# Altium PCB VESC_POWER_91mm.PcbDoc
Units mm, origin at the board's own origin, x right, y up, seen from the top; angles counter-clockwise.
Board outline 91 x 56 mm, 4 copper layers (Top Layer, Layer 1, Layer 2, Bottom Layer), stack 1.622 mm thick; 66 components, 20 nets, 161 pads, 1124 vias.
Unrouted connection lines stored in the file: 74.
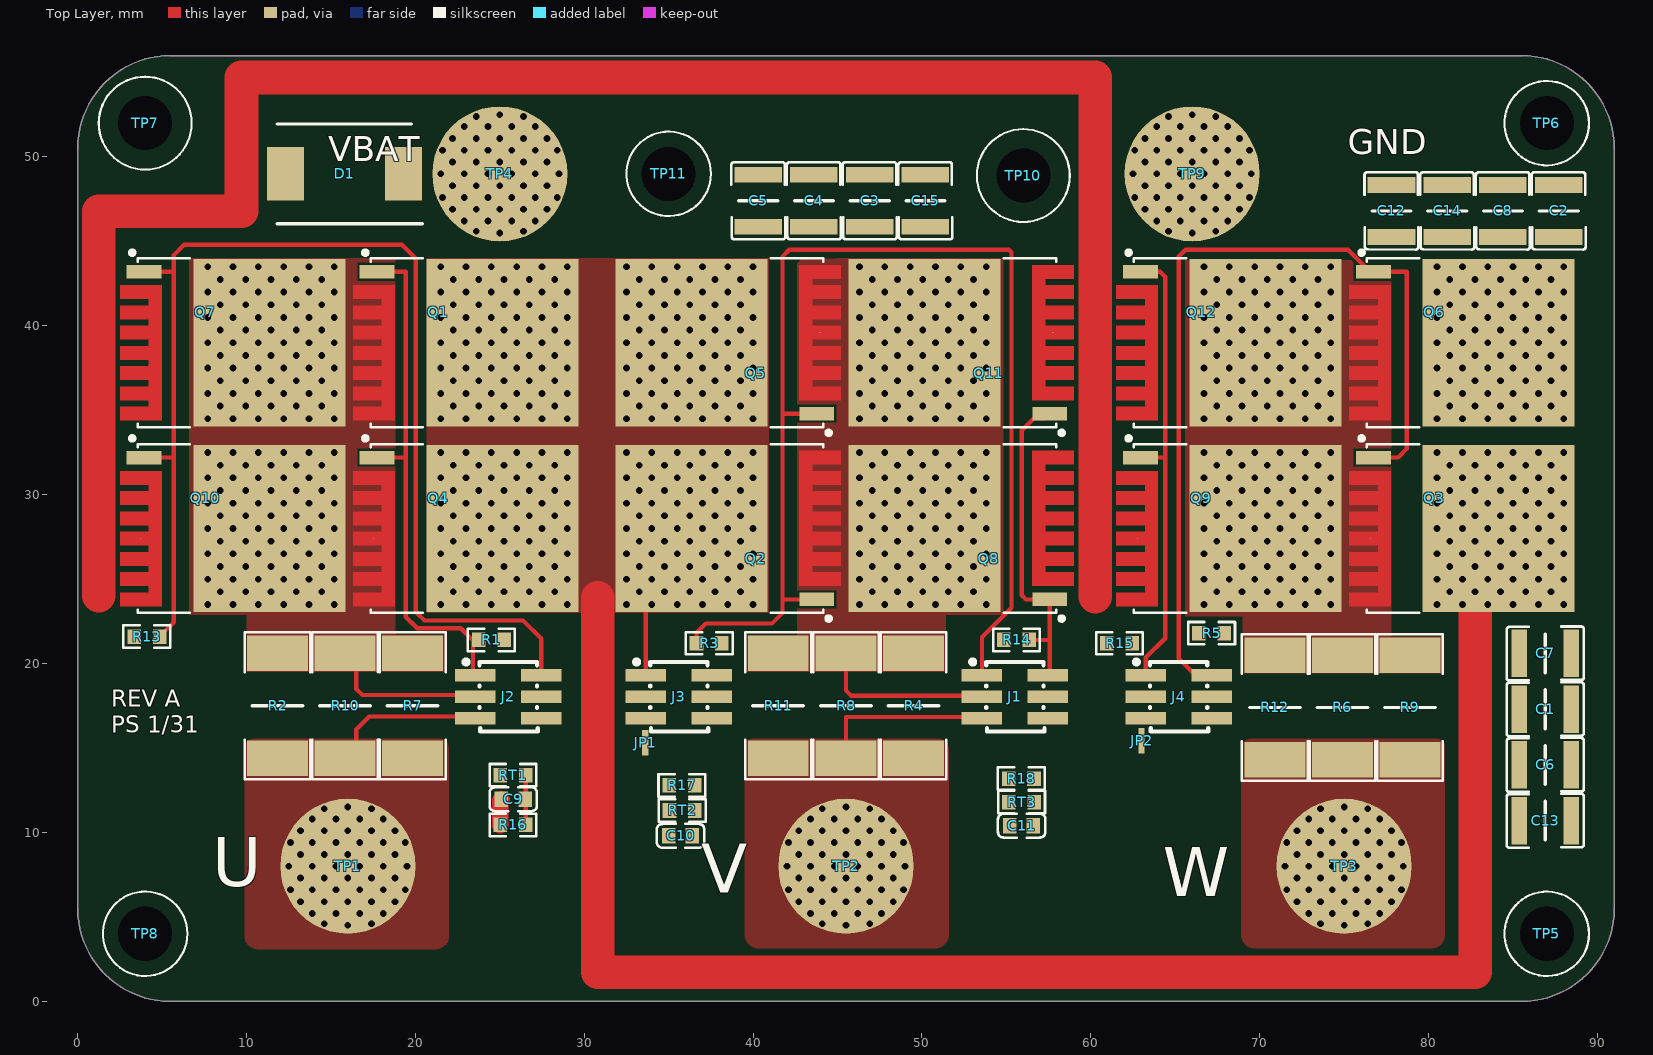
[diagram p0: Top Layer view]
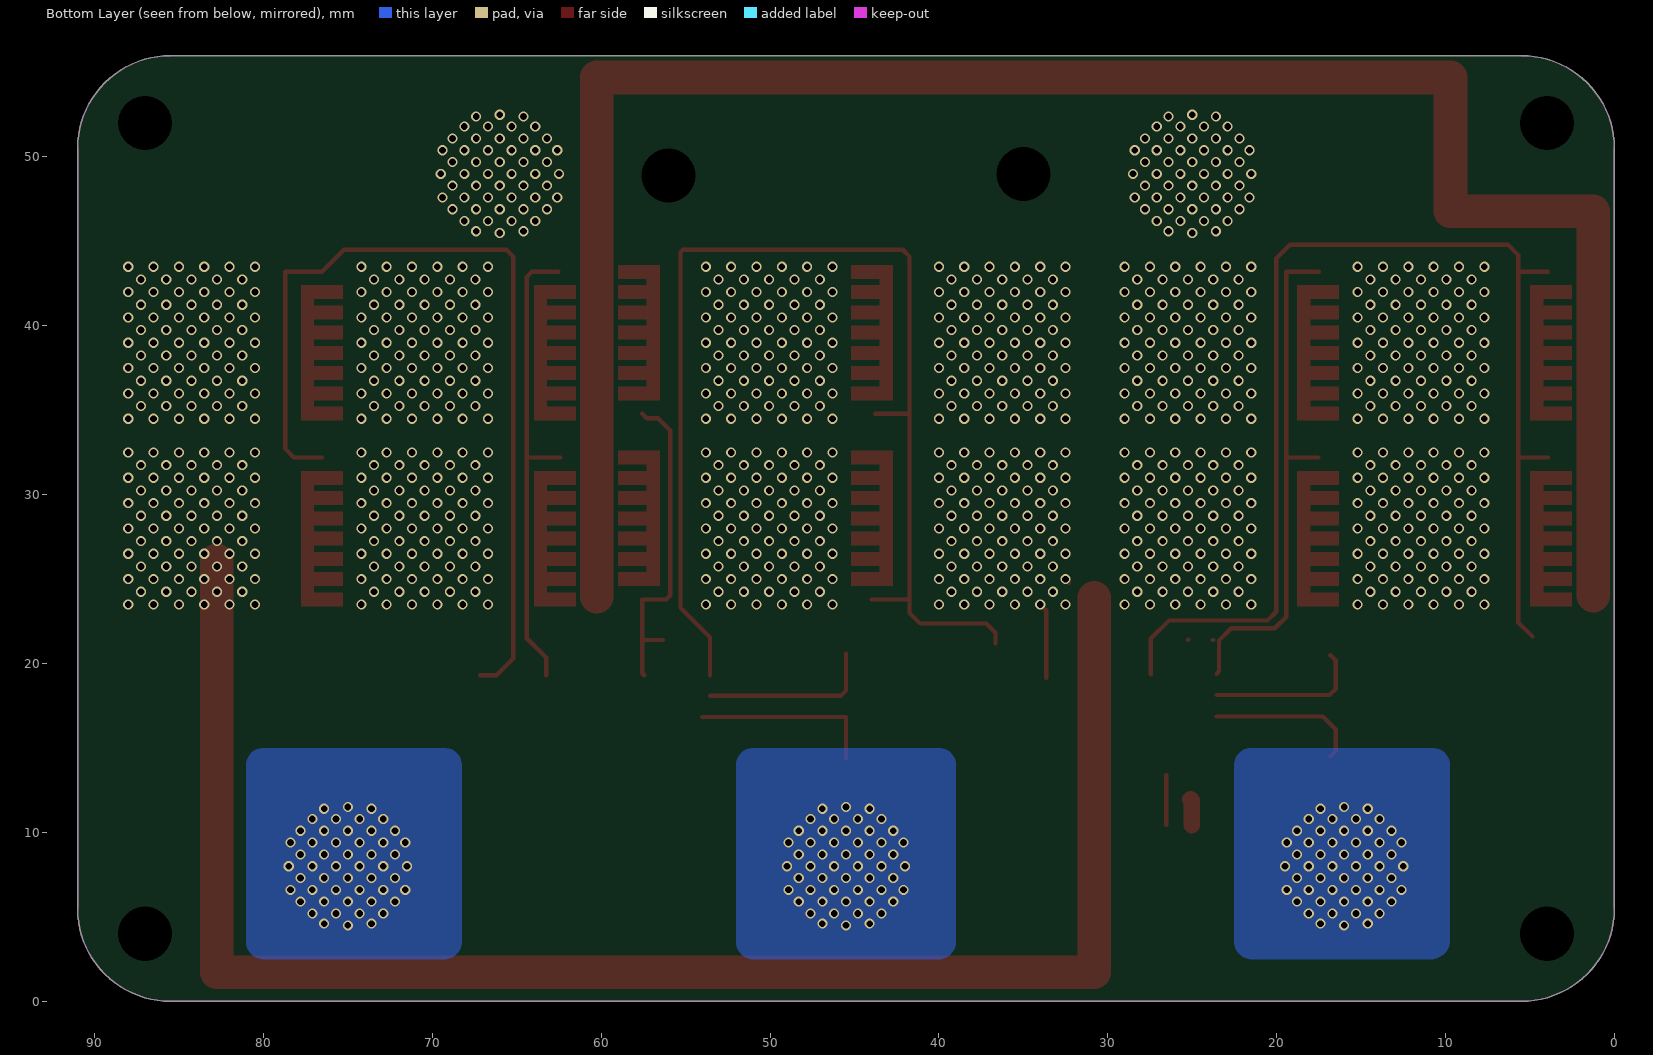
[diagram p1: Bottom Layer view, seen from below]
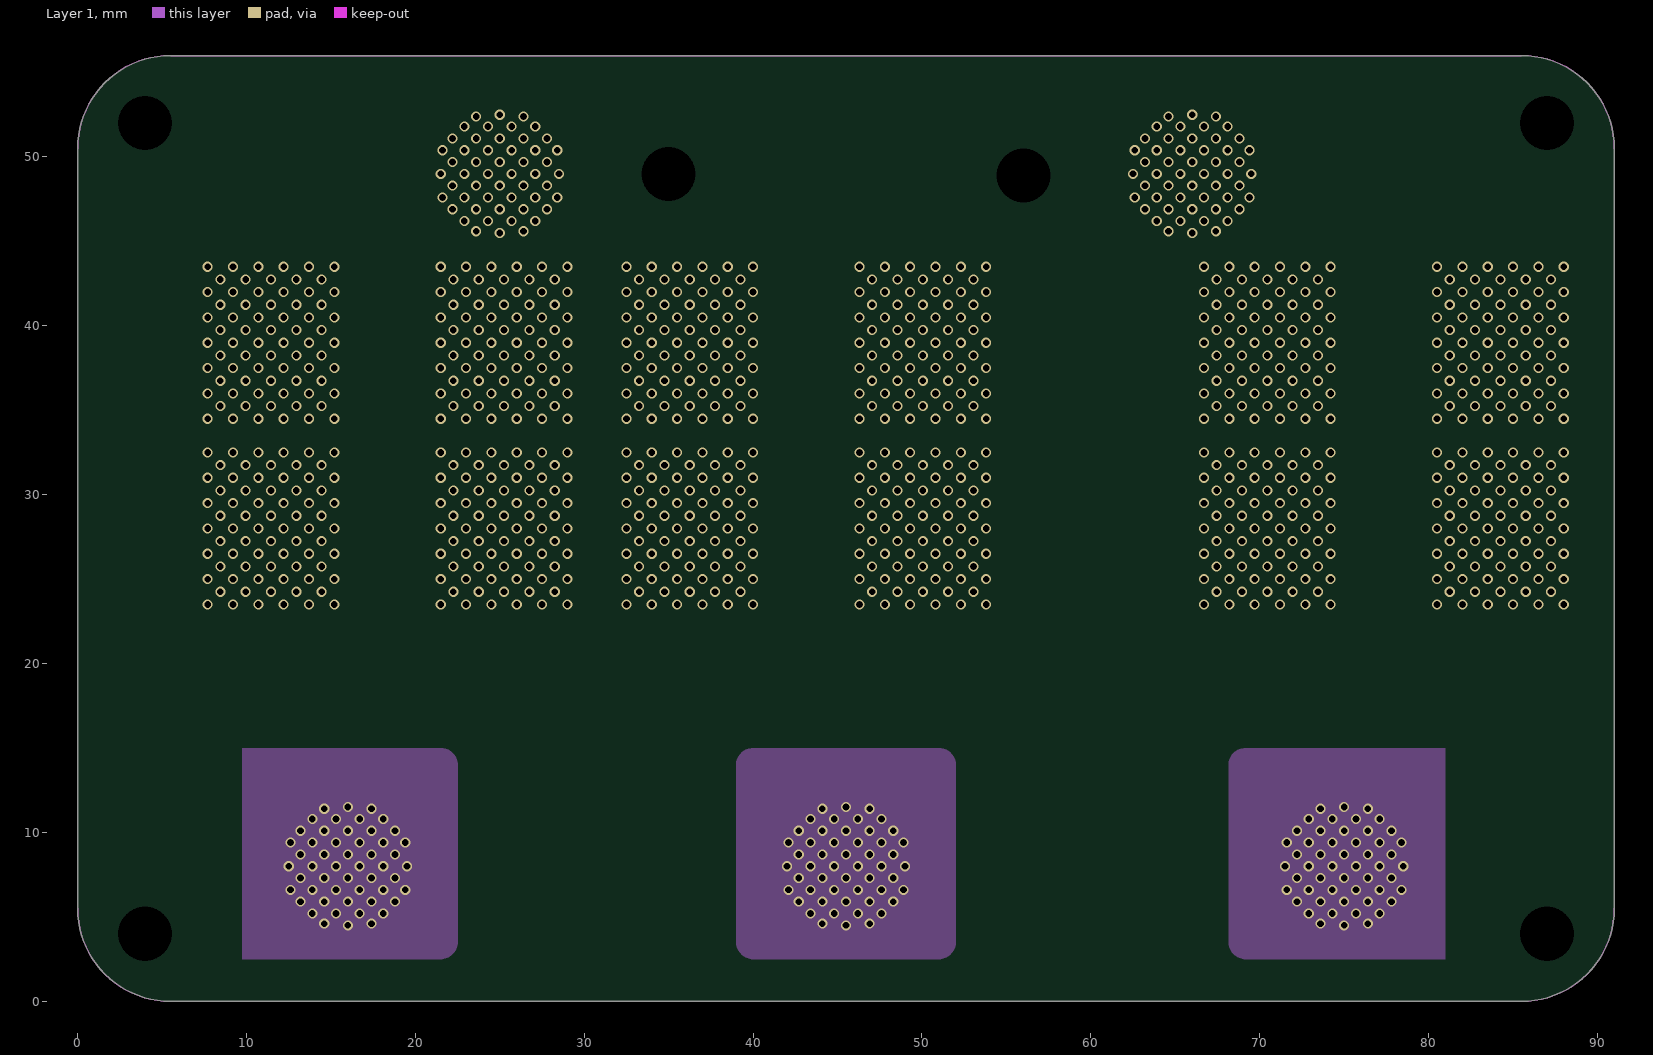
[diagram p2: Layer 1]
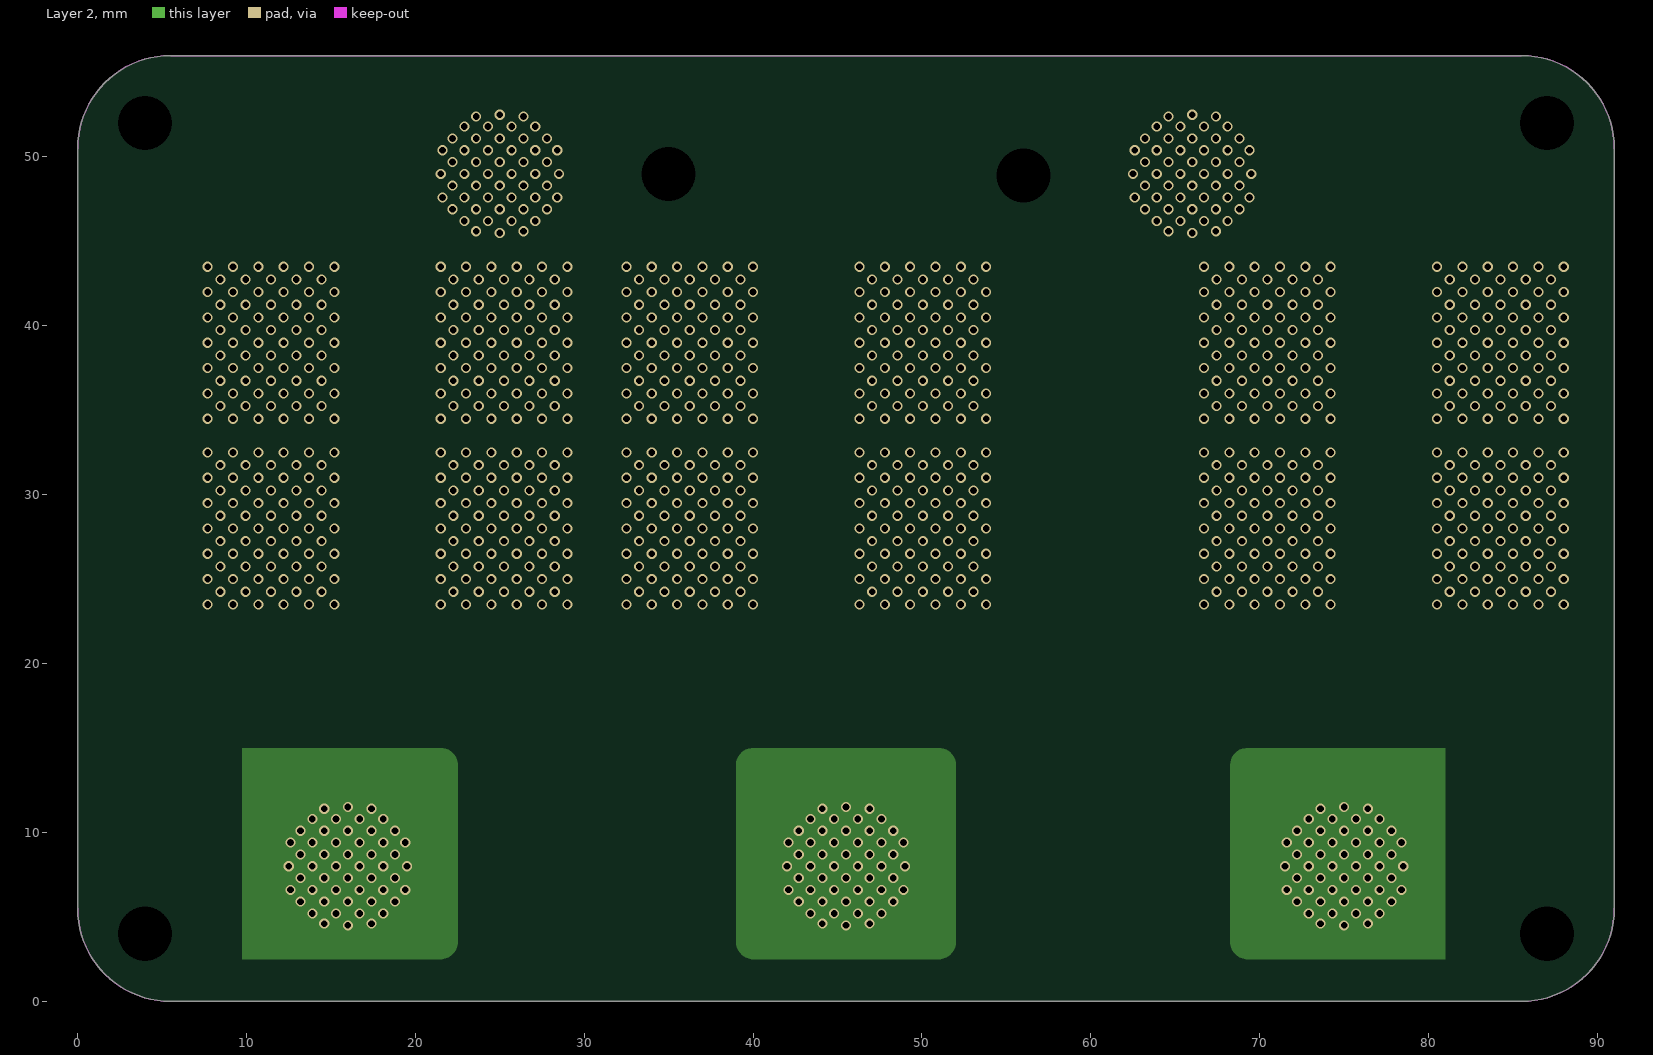
[diagram p3: Layer 2]

## Layer stack, top to bottom
Top Solder: solder mask 0.0102, Solder Resist, Dk 3.5
Top Layer: signal copper 0.035
Dielectric 2: prepreg 0.2083, PP-022, Dk 4.5
Layer 1: signal copper 0.0175
Dielectric 1: core 1.1, Core-024, Dk 4.6
Layer 2: signal copper 0.0175
Dielectric 3: prepreg 0.2083, PP-022, Dk 4.5
Bottom Layer: signal copper 0.035
Bottom Solder: solder mask 0.0102, Solder Resist, Dk 3.5

## Board outline
0,5.5 ccw(c5.5,5.5) 5.5,0 85.5,0 ccw(c85.5,5.5) 91,5.5 91,50.5 ccw(c85.5,50.5) 85.5,56 5.5,56 ccw(c5.5,50.5) 0,50.5

## Design rules (kind name [scope] priority, off if disabled: settings)
BoardOutlineClearance [All] p1: gap=0.254 ignorepadtopadclearanceinfootprint=FALSE except(0: Arc-SplitContinuation Track-SplitContinuation SMDPad-SplitContinuation THPad-SplitContinuation Via-SplitContinuation Fill-SplitContinuation Poly-SplitContinuation Region-SplitContinuation Text-SplitContinuation)
Clearance [All] p1: gap=0.152 ignorepadtopadclearanceinfootprint=FALSE
HoleSize [All] p1: absolutevalues=TRUE maxlimit=5 minlimit=0.025 maxpercent=80.000 minpercent=20.000
HoleToHoleClearance [All] p1: gap=0.229 allowstackedmicrovias=TRUE
MinimumSolderMaskSliver [All] p1: minsoldermaskwidth=0.051
PolygonConnect [All] p1: connectstyle=Direct reliefconductorwidth=0.254 reliefentries=4 polygonreliefangle="90 Angle" airgapwidth=0.254
RoutingVias [All] p1: holewidth=0.711 width=1.27 viastyle="Through Hole" minholewidth=0.711 minwidth=1.27 maxholewidth=0.711 maxwidth=1.27
SilkToSilkClearance [All] p1: silktosilkclearance=0
SilkToSolderMaskClearance [IsPad] p1: minsilkscreentomaskgap=0.025 clearancetoexposedcopper=TRUE
SolderMaskExpansion [All] p1: expansion=0.102 istentingtop=FALSE
Width [All] p1: maxlimit=2.54 minlimit=0.152 preferedwidth=0.254
25 further rules are at their usual default settings.

## Components (designator, comment, footprint, x,y, rotation, side; value= is the part's Value field where it differs from the comment)
C1 "2.2uF/100V" CAPC3225X230N 86.9,17.3 r180 top
C2 "2.2uF/100V" CAPC3225X230N 87.7,46.8 r270 top
C3 "2.2uF/100V" CAPC3225X230N 46.9,47.4 r270 top
C4 "2.2uF/100V" CAPC3225X230N 43.6,47.4 r270 top
C5 "2.2uF/100V" CAPC3225X230N 40.3,47.4 r270 top
C6 "2.2uF/100V" CAPC3225X230N 86.9,14 r180 top
C7 "2.2uF/100V" CAPC3225X230N 86.9,20.6 r180 top
C8 "2.2uF/100V" CAPC3225X230N 84.4,46.8 r270 top
C9 "2.2uF/6.3V" C0603 25.796,11.964 r180 top
C10 "2.2uF/6.3V" C0603 35.7,9.8 r180 top
C11 "2.2uF/6.3V" C0603 55.9,10.4 r180 top
C12 "2.2uF/100V" CAPC3225X230N 77.8,46.8 r270 top
C13 "2.2uF/100V" CAPC3225X230N 86.9,10.7 r180 top
C14 "2.2uF/100V" CAPC3225X230N 81.1,46.8 r270 top
C15 "2.2uF/100V" CAPC3225X230N 50.2,47.4 r270 top
D1 "SMCJ75A" DIOM7959X262N 15.8,49 r180 top
J1 "PZ127-2-03-S" HDR-SMD_6P-P1.27-V-M-R2-C3-LS5.3 55.5,18.035 r270 top
J2 "PZ127-2-03-S" HDR-SMD_6P-P1.27-V-M-R2-C3-LS5.3 25.5,18.035 r270 top
J3 "PZ127-2-03-S" HDR-SMD_6P-P1.27-V-M-R2-C3-LS5.3 35.6,18.035 r270 top
J4 "PZ127-2-03-S" HDR-SMD_6P-P1.27-V-M-R2-C3-LS5.3 65.2,18.035 r270 top
JP1 "Short" SHORT 33.6,15.322 r90 top
JP2 "Short" SHORT 63,15.422 r90 top
Q1 "NCEP023N10LL" TOLL 23,39 r0 top
Q2 "NCEP023N10LL" TOLL 38.5,28 r180 top
Q3 "NCEP023N10LL" TOLL 82,28 r0 top
Q4 "NCEP023N10LL" TOLL 23,28 r0 top
Q5 "NCEP023N10LL" TOLL 38.5,39 r180 top
Q6 "NCEP023N10LL" TOLL 82,39 r0 top
Q7 "NCEP023N10LL" TOLL 9.2,39 r0 top
Q8 "NCEP023N10LL" TOLL 52.3,28 r180 top
Q9 "NCEP023N10LL" TOLL 68.2,28 r0 top
Q10 "NCEP023N10LL" TOLL 9.2,28 r0 top
Q11 "NCEP023N10LL" TOLL 52.3,39 r180 top
Q12 "NCEP023N10LL" TOLL 68.2,39 r0 top
R1 "5.1K/1%" R0603 24.5,21.4 r0 top
R2 "1mR/1%" R2512 11.836,17.5 r90 top
R3 "5.1K/1%" R0603 37.4,21.2 r180 top
R4 "1mR/1%" R2512 49.5,17.5 r90 top
R5 "5.1K/1%" R0603 67.15,21.8 r180 top
R6 "1mR/1%" R2512 74.896,17.4 r90 top
R7 "1mR/1%" R2512 19.836,17.5 r90 top
R8 "1mR/1%" R2512 45.5,17.5 r90 top
R9 "1mR/1%" R2512 78.896,17.4 r90 top
R10 "1mR/1%" R2512 15.836,17.5 r90 top
R11 "1mR/1%" R2512 41.484,17.5 r90 top
R12 "1mR/1%" R2512 70.896,17.4 r90 top
R13 "5.1K/1%" R0603 4.1,21.6 r0 top
R14 "5.1K/1%" R0603 55.6,21.4 r0 top
R15 "5.1K/1%" R0603 61.7,21.2 r0 top
R16 "10K/1%" R0603 25.776,10.449 r0 top
R17 "10K/1%" R0603 35.783,12.788 r0 top
R18 "10K/1%" R0603 55.883,13.188 r0 top
RT1 "NTC" R0603 25.776,13.394 r0 top
RT2 "NTC" R0603 35.8,11.3 r0 top
RT3 "NTC" R0603 55.9,11.8 r0 top
TP1 "PHA" TP_8X8 16,8 r0 top
TP2 "PHB" TP_8X8 45.5,8 r0 top
TP3 "PHC" TP_8X8 75,8 r0 top
TP4 "GND" TP_8X8 25,49 r0 top locked
TP5 "TEST POINT" HOLE-3.2MM_M 87,4 r0 top
TP6 "TEST POINT" HOLE-3.2MM_M 87,52 r0 top
TP7 "TEST POINT" HOLE-3.2MM_M 4,52 r0 top
TP8 "TEST POINT" HOLE-3.2MM_M 4,4 r0 top
TP9 "VIN" TP_8X8 66,49 r0 top locked
TP10 "TEST POINT" HOLE-3.2MM_M 56,48.9 r0 top (schematic designator TP6)
TP11 "TEST POINT" HOLE-3.2MM_M 35,49 r0 top (schematic designator TP6)

## Footprints (in the part's own frame and the unit in brackets; to place one, negate y for a bottom-side part, rotate by r counter-clockwise, add the part's x,y. Pads: shape width x height; smd on the part's side, far side on the other; paste and mask are expansions set on the pad)
C0603 [mm] "C0603"
  rect 0.8x0.9 smd: 1(-0.7,0) 2(0.7,0)
  silkscreen extent -1.41,-0.7 1.4,0.7, body extent -0.8,-0.41 0.8,0.41, height 0.9
CAPC3225X230N [mm]
  rect 0.92x2.82 smd: 1(-1.54,0) 2(1.54,0)
  silkscreen extent -2.3,-1.6 2.28,1.6, body extent -1.6,-1.25 1.6,1.25, height 2.47
DIOM7959X262N [mm]
  rect 2.2x3.15 smd: 1(-3.5,0) 2(3.5,0)
  silkscreen extent -4.6,-2.95 3.97,2.95, body extent -3.97,-2.95 3.97,2.95, height 2.31
HDR-SMD_6P-P1.27-V-M-R2-C3-LS5.3 [mm]
  rect 0.74x2.4 smd paste+0 mask+0.05: 1(-1.27,-1.95) 2(-1.27,1.95) 3(0,-1.95) 4(0,1.95) 5(1.27,-1.95) 6(1.27,1.95)
  silkscreen extent -2.2,-2.64 2.06,1.75
HOLE-3.2MM_M [mm]
  round 0 hole 3.2 unplated: 1(0,0)
  silkscreen extent -2.5,-2.5 2.5,2.5
R0603 [mm] "R0603"
  rect 0.806x0.864 smd: 1(-0.753,0) 2(0.753,0)
  silkscreen extent -1.38,-0.66 1.39,0.66, body extent -0.79,-0.43 0.79,0.43, height 0.5
R2512 [mm]
  rect 2.1x3.6 smd: 1(-3.1,0) 2(3.1,0)
  silkscreen extent -4.35,-1.95 4.35,1.95, body extent -3.2,-1.6 3.2,1.6, height 0.8
SHORT [mil] "SHORT"
  rect 30x15 smd paste-99999 mask+0: 1(-14.9,0) 2(14.9,0)
TOLL [mm] "TOLL"
  rect 2.063x0.8 smd: 1(-5.269,4.2)
  rect 9x9.9 smd: 2(2.15,0)
  oct 0.025x0.025 smd: 3(-5.46,-0.6)
  round 0.025 smd: 3(-5.46,-0.6)
  Top Layer region: -6.691,3.4 -4.228,3.4 -4.228,-4.6 -6.691,-4.6 -6.691,-3.8 -4.991,-3.8 -4.991,-3.4 -6.691,-3.4 -6.691,-2.6 -4.991,-2.6 -4.991,-2.2 -6.691,-2.2 -6.691,-1.4 -4.991,-1.4 -4.991,-1 -6.691,-1 -6.691,-0.2 -4.991,-0.2 -4.991,0.2 -6.691,0.2 -6.691,1 -4.991,1 -4.991,1.4 -6.691,1.4 -6.691,2.2 -4.991,2.2 -4.991,2.6 -6.691,2.6
  silkscreen extent -6.1,-5 -2.55,5.46, body extent -6.04,-4.95 5.63,4.95, height 2.3
TP_8X8 [mm] "TP_8X8"
  round 8 smd: 1(0,0)
  body extent -3.75,-3.75 3.74,3.75, height 23

## Part data
C1 C2 C3 C4 C5 C6 C7 C8 C9 C10 C11 C12 C13 C14 C15: library part "CAP NP"
  C1 C2 C3 C4 C5 C6 C7 C8 C12 C13 C14 C15: PCB Footprint=C1206
  C9 C10 C11: PCB Footprint=C0603
D1: "TVS Diode (Uni-directional)", Manufacturer_Name=Bourns, Mouser Part Number=652-SMCJ75A, Arrow Part Number=SMCJ75A, Arrow Price/Stock=https://www.arrow.com/en/products/smcj75a/bourns?region=nac, Datasheet Link=https://www.bourns.com/docs/Product-Datasheets/SMCJ.pdf, Height=2.62mm, Manufacturer_Part_Number=SMCJ75A, Mouser Price/Stock=https://www.mouser.co.uk/ProductDetail/Bourns/SMCJ75A?qs=%252Bf8Cd6aE5bzxrdYbQ%252Bf9mA%3D%3D
J1 J2 J3 J4: Color=黑色, Current Rating (Max)=1A, JLCPCB Part Class="Extended Part", LCSC Part Name="2x3P 间距:1.27mm 方针 立贴", Manufacturer=HCTL(华灿天禄), Operating Temperature Range=-40℃~+105℃, Soldering Temperature(Max)=260℃@10S, Add into BOM=yes, Circluar Pins/Square Pins=方针, Contact Material=黄铜, Convert to PCB=yes, Datasheet=https://atta.szlcsc.com/upload/public/pdf/source/20230609/2ACB07ADC7D4DAF6D292F3D23C037F6C.pdf, Device=PZ127-2-03-S, Insulation Height=1.5mm, Length of End Connection Pin=-, Length of Mating Pin=4mm, Manufacturer Part=PZ127-2-03-S, Mounting Type=立贴, Number of Pins=6P, Number of Rows=双排, Pin Structure=2x3P, Pitch=1.27mm, Row Spacing=1.27mm, Supplier=LCSC, Supplier Footprint=SMD,P=1.27mm, Supplier Part=C3975186, Symbol=PZ127-2-03-S
JP1 JP2: library part SHORT, "2 PIN SHORTED TO CONNECT DIFFERENT NETS", CLASS=DISCRETE, PART_NUMBER=TMP-442
Q1 Q2 Q3 Q4 Q5 Q6 Q7 Q8 Q9 Q10 Q11 Q12: library part "MOSFET N", PCB Footprint=TOLL
R1 R2 R3 R4 R5 R6 R7 R8 R9 R10 R11 R12 R13 R14 R15 R16 R17 R18: library part RESISTOR
  R1 R3 R5 R13 R14 R15 R16 R17 R18: PCB Footprint=R0603
  R2 R4 R6 R7 R8 R9 R10 R11 R12: PCB Footprint=R3920
TP1 TP2 TP3 TP4 TP9: library part "TEST POINT", PCB Footprint=TP_8x8
RT1 RT2 RT3: PCB Footprint=R0603

## Via types
v1: diameter 0.6, hole 0.4, Top Layer to Bottom Layer, tented both sides, 1124 vias

## Nets (pads, with @x,y where several pads share a name; then routed paths per layer and width w, separated by ;. In a path a pad name is that pad's centre, name@x,y a point inside that pad or via, vN(x,y) a via of type N, cw(c..) or ccw(c..) an arc to the next point about the centre after c; other vN are vias at no path point)
3V3: J1.6 J2.6 J3.6 RT1.1 RT2.1 RT3.1
ADC_TEMP: C9.1 J2.4 R16.2 RT1.2 | length 2.9
  Top Layer w0.254: R16.2 RT1.2
ADC_TEMP2: C10.1 J3.4 R17.2 RT2.2
ADC_TEMP3: C11.1 J1.4 R18.2 RT3.2
GHA: J2.1 Q1.1 Q4.1 R1.2 | length 30.9
  Top Layer w0.254: Q1.1@17.5,43.2 17.531,43.2 19.423,43.2 19.423,32.2 ; Q4.1@17.531,32.2 19.423,32.2 ; J2.1@23.55,19.405 23.412,19.543 23.412,21.368 22.692,22.088 20.112,22.088 19.423,22.777 19.423,32.2 ; R1.2@25.225,21.428 R1.2
GHB: J1.1 Q2.1 Q5.1 R3.2 | length 71.1
  Top Layer w0.254: R3.2 36.647,21.824 37.2,22.377 41.11,22.377 41.734,23 41.734,23.8 ; Q5.1 41.734,34.8 ; Q2.1@43.969,23.8 41.734,23.8 ; J1.1 53.55,21.555 55.3,23.305 55.3,44.351 55.151,44.5 42.134,44.5 41.734,44.099 41.734,34.8 ; 41.734,23.8 41.734,34.8
GHC: J4.2 Q3.1 Q6.1 R5.2 | length 53.2
  Top Layer w0.254: J4.2 66.195,19.305 65.2,20.3 65.2,44.1 65.6,44.5 75.231,44.5 76.531,43.2 78.7,43.2 78.7,32.7 78.2,32.2 Q3.1@76.531,32.2
GLA: J2.2 Q7.1 Q10.1 R13.2 | length 72.5
  Top Layer w0.254: Q10.1 5.7,32.2 ; Q7.1 5.7,43.2 ; R13.2 5.7,22.447 5.7,32.2 ; J2.2@27.45,19.37 27.45,21.477 26.376,22.551 20.535,22.551 20.018,23.068 20.018,43.982 19.2,44.8 6.3,44.8 5.7,44.2 5.7,43.2 ; 5.7,32.2 5.7,43.2
GLB: J1.2 Q8.1 Q11.1 R14.2 | length 19.4
  Top Layer w0.254: R14.2 57.569,21.4 ; J1.2 57.569,19.424 57.569,21.4 ; Q11.1 57.296,34.527 56.627,34.527 55.904,33.804 55.904,24.046 56.15,23.8 Q8.1 57.569,21.4
GLC: J4.1 Q9.1 Q12.1 R15.2 | length 28.1
  Top Layer w0.254: Q9.1@62.409,32.2 64.4,32.2 ; Q12.1@62.531,43.2 Q12.1 64.1,43.2 64.4,42.9 64.4,32.2 ; J4.1 63.25,20.35 64.4,21.5 64.4,32.2
GND: C1.1 C2.1 C3.1 C4.1 C5.1 C6.1 C7.1 C8.1 C9.2 C10.2 C11.2 C12.1 C13.1 C14.1 C15.1 D1.2 J3.2 JP1.1 JP2.1 Q7.3 Q8.3 Q9.3 Q10.3 Q11.3 Q12.3 R13.1 R14.1 R15.1 R16.1 R17.1 R18.1 TP5.1 TP6.1 TP7.1 TP8.1 TP9.1 | length 121.9
  Top Layer w1: R16.1 25.023,11.891 C9.2
  Top Layer w2: 1.254,24.037 1.254,46.789 9.7,46.789 9.7,54.7 60.255,54.7 60.255,23.968
  other v1: 66,45.5 64.6,45.6 67.4,45.6 63.9,46.2 65.3,46.2 66.7,46.2 68.1,46.2 63.2,46.9 64.6,46.9 66,46.9 67.4,46.9 68.8,46.9 62.6,47.6 63.9,47.6 65.3,47.6 66.7,47.6 68.1,47.6 69.4,47.6 63.2,48.3 64.6,48.3 66,48.3 67.4,48.3 68.8,48.3 62.5,49 63.9,49 65.3,49 66.7,49 68.1,49 69.5,49 63.2,49.7 64.6,49.7 66,49.7 67.4,49.7 68.8,49.7 62.6,50.4 63.9,50.4 65.3,50.4 66.7,50.4 68.1,50.4 69.4,50.4 63.2,51.1 64.6,51.1 66,51.1 67.4,51.1 68.8,51.1 63.9,51.8 65.3,51.8 66.7,51.8 68.1,51.8 64.6,52.4 67.4,52.4 66,52.5
NetJ3_3: J3.3 J3.5 JP1.2
NetJ4_3: J4.3 J4.5 JP2.2
PHA: J2.5 R2.1 R7.1 R10.1 TP1.1 | length 9.1
  Top Layer w0.254: R10.1@16.824,14.5 16.5,14.824 16.5,16.1 17.265,16.865 J2.5@23.55,16.865
  other v1: 16,4.5 14.6,4.6 17.4,4.6 13.9,5.2 15.3,5.2 16.7,5.2 18.1,5.2 13.2,5.9 14.6,5.9 16,5.9 17.4,5.9 18.8,5.9 12.6,6.6 13.9,6.6 15.3,6.6 16.7,6.6 18.1,6.6 19.4,6.6 13.2,7.3 14.6,7.3 16,7.3 17.4,7.3 18.8,7.3 12.5,8 13.9,8 15.3,8 16.7,8 18.1,8 19.5,8 13.2,8.7 14.6,8.7 16,8.7 17.4,8.7 18.8,8.7 12.6,9.4 13.9,9.4 15.3,9.4 16.7,9.4 18.1,9.4 19.4,9.4 13.2,10.1 14.6,10.1 16,10.1 17.4,10.1 18.8,10.1 13.9,10.8 15.3,10.8 16.7,10.8 18.1,10.8 14.6,11.4 17.4,11.4 16,11.5
PHB: J1.5 R4.1 R8.1 R11.1 TP2.1 | length 10.9
  Top Layer w0.254: R8.1 45.5,16.83 J1.5@54.011,16.83
  other v1: 45.5,4.5 44.1,4.6 46.9,4.6 43.4,5.2 44.8,5.2 46.2,5.2 47.6,5.2 42.7,5.9 44.1,5.9 45.5,5.9 46.9,5.9 48.3,5.9 42.1,6.6 43.4,6.6 44.8,6.6 46.2,6.6 47.6,6.6 48.9,6.6 42.7,7.3 44.1,7.3 45.5,7.3 46.9,7.3 48.3,7.3 42,8 43.4,8 44.8,8 46.2,8 47.6,8 49,8 42.7,8.7 44.1,8.7 45.5,8.7 46.9,8.7 48.3,8.7 42.1,9.4 43.4,9.4 44.8,9.4 46.2,9.4 47.6,9.4 48.9,9.4 42.7,10.1 44.1,10.1 45.5,10.1 46.9,10.1 48.3,10.1 43.4,10.8 44.8,10.8 46.2,10.8 47.6,10.8 44.1,11.4 46.9,11.4 45.5,11.5
PHC: J4.6 R6.1 R9.1 R12.1 TP3.1
  other v1: 75,4.5 73.6,4.6 76.4,4.6 72.9,5.2 74.3,5.2 75.7,5.2 77.1,5.2 72.2,5.9 73.6,5.9 75,5.9 76.4,5.9 77.8,5.9 71.6,6.6 72.9,6.6 74.3,6.6 75.7,6.6 77.1,6.6 78.4,6.6 72.2,7.3 73.6,7.3 75,7.3 76.4,7.3 77.8,7.3 71.5,8 72.9,8 74.3,8 75.7,8 77.1,8 78.5,8 72.2,8.7 73.6,8.7 75,8.7 76.4,8.7 77.8,8.7 71.6,9.4 72.9,9.4 74.3,9.4 75.7,9.4 77.1,9.4 78.4,9.4 72.2,10.1 73.6,10.1 75,10.1 76.4,10.1 77.8,10.1 72.9,10.8 74.3,10.8 75.7,10.8 77.1,10.8 73.6,11.4 76.4,11.4 75,11.5
SHA: J2.3 Q1.3 Q4.3 Q7.2 Q10.2 R1.1 R2.2 R7.2 R10.2 | length 9.4
  Top Layer w0.254: R10.2@16.824,20.5 16.5,20.176 16.5,18.5 16.865,18.135 23.55,18.135 J2.3@23.552,18.137 ; R1.1 R1.1@23.794,21.4
  other v1: 7.7,23.5 9.2,23.5 10.7,23.5 12.2,23.5 13.7,23.5 15.2,23.5 8.45,24.25 9.95,24.25 11.45,24.25 12.95,24.25 14.45,24.25 7.7,25 9.2,25 10.7,25 12.2,25 13.7,25 15.2,25 8.45,25.75 9.95,25.75 11.45,25.75 12.95,25.75 14.45,25.75 7.7,26.5 9.2,26.5 10.7,26.5 12.2,26.5 13.7,26.5 15.2,26.5 8.45,27.25 9.95,27.25 11.45,27.25 12.95,27.25 14.45,27.25 7.7,28 9.2,28 10.7,28 12.2,28 13.7,28 15.2,28 8.45,28.75 9.95,28.75 11.45,28.75 12.95,28.75 14.45,28.75 7.7,29.5 9.2,29.5 10.7,29.5 12.2,29.5 13.7,29.5 15.2,29.5 8.45,30.25 9.95,30.25 11.45,30.25 12.95,30.25 14.45,30.25 7.7,31 9.2,31 10.7,31 12.2,31 13.7,31 15.2,31 8.45,31.75 9.95,31.75 11.45,31.75 12.95,31.75 14.45,31.75 7.7,32.5 9.2,32.5 10.7,32.5 12.2,32.5 13.7,32.5 15.2,32.5 7.7,34.5 9.2,34.5 10.7,34.5 12.2,34.5 13.7,34.5 15.2,34.5 8.45,35.25 9.95,35.25 11.45,35.25 12.95,35.25 14.45,35.25 7.7,36 9.2,36 10.7,36 12.2,36 13.7,36 15.2,36 8.45,36.75 9.95,36.75 11.45,36.75 12.95,36.75 14.45,36.75 7.7,37.5 9.2,37.5 10.7,37.5 12.2,37.5 13.7,37.5 15.2,37.5 8.45,38.25 9.95,38.25 11.45,38.25 12.95,38.25 14.45,38.25 7.7,39 9.2,39 10.7,39 12.2,39 13.7,39 15.2,39 8.45,39.75 9.95,39.75 11.45,39.75 12.95,39.75 14.45,39.75 7.7,40.5 9.2,40.5 10.7,40.5 12.2,40.5 13.7,40.5 15.2,40.5 8.45,41.25 9.95,41.25 11.45,41.25 12.95,41.25 14.45,41.25 7.7,42 9.2,42 10.7,42 12.2,42 13.7,42 15.2,42 8.45,42.75 9.95,42.75 11.45,42.75 12.95,42.75 14.45,42.75 7.7,43.5 9.2,43.5 10.7,43.5 12.2,43.5 13.7,43.5 15.2,43.5
SHB: J1.3 Q2.3 Q5.3 Q8.2 Q11.2 R3.1 R4.2 R8.2 R11.2 | length 10.4
  Top Layer w0.254: R8.2 45.5,18.4 45.8,18.1 J1.3@53.55,18.1
  other v1: 46.3,23.5 47.8,23.5 49.3,23.5 50.8,23.5 52.3,23.5 53.8,23.5 47.05,24.25 48.55,24.25 50.05,24.25 51.55,24.25 53.05,24.25 46.3,25 47.8,25 49.3,25 50.8,25 52.3,25 53.8,25 47.05,25.75 48.55,25.75 50.05,25.75 51.55,25.75 53.05,25.75 46.3,26.5 47.8,26.5 49.3,26.5 50.8,26.5 52.3,26.5 53.8,26.5 47.05,27.25 48.55,27.25 50.05,27.25 51.55,27.25 53.05,27.25 46.3,28 47.8,28 49.3,28 50.8,28 52.3,28 53.8,28 47.05,28.75 48.55,28.75 50.05,28.75 51.55,28.75 53.05,28.75 46.3,29.5 47.8,29.5 49.3,29.5 50.8,29.5 52.3,29.5 53.8,29.5 47.05,30.25 48.55,30.25 50.05,30.25 51.55,30.25 53.05,30.25 46.3,31 47.8,31 49.3,31 50.8,31 52.3,31 53.8,31 47.05,31.75 48.55,31.75 50.05,31.75 51.55,31.75 53.05,31.75 46.3,32.5 47.8,32.5 49.3,32.5 50.8,32.5 52.3,32.5 53.8,32.5 46.3,34.5 47.8,34.5 49.3,34.5 50.8,34.5 52.3,34.5 53.8,34.5 47.05,35.25 48.55,35.25 50.05,35.25 51.55,35.25 53.05,35.25 46.3,36 47.8,36 49.3,36 50.8,36 52.3,36 53.8,36 47.05,36.75 48.55,36.75 50.05,36.75 51.55,36.75 53.05,36.75 46.3,37.5 47.8,37.5 49.3,37.5 50.8,37.5 52.3,37.5 53.8,37.5 47.05,38.25 48.55,38.25 50.05,38.25 51.55,38.25 53.05,38.25 46.3,39 47.8,39 49.3,39 50.8,39 52.3,39 53.8,39 47.05,39.75 48.55,39.75 50.05,39.75 51.55,39.75 53.05,39.75 46.3,40.5 47.8,40.5 49.3,40.5 50.8,40.5 52.3,40.5 53.8,40.5 47.05,41.25 48.55,41.25 50.05,41.25 51.55,41.25 53.05,41.25 46.3,42 47.8,42 49.3,42 50.8,42 52.3,42 53.8,42 47.05,42.75 48.55,42.75 50.05,42.75 51.55,42.75 53.05,42.75 46.3,43.5 47.8,43.5 49.3,43.5 50.8,43.5 52.3,43.5 53.8,43.5
SHC: J4.4 Q3.3 Q6.3 Q9.2 Q12.2 R5.1 R6.2 R9.2 R12.2
  other v1: 66.7,23.5 68.2,23.5 69.7,23.5 71.2,23.5 72.7,23.5 74.2,23.5 67.45,24.25 68.95,24.25 70.45,24.25 71.95,24.25 73.45,24.25 66.7,25 68.2,25 69.7,25 71.2,25 72.7,25 74.2,25 67.45,25.75 68.95,25.75 70.45,25.75 71.95,25.75 73.45,25.75 66.7,26.5 68.2,26.5 69.7,26.5 71.2,26.5 72.7,26.5 74.2,26.5 67.45,27.25 68.95,27.25 70.45,27.25 71.95,27.25 73.45,27.25 66.7,28 68.2,28 69.7,28 71.2,28 72.7,28 74.2,28 67.45,28.75 68.95,28.75 70.45,28.75 71.95,28.75 73.45,28.75 66.7,29.5 68.2,29.5 69.7,29.5 71.2,29.5 72.7,29.5 74.2,29.5 67.45,30.25 68.95,30.25 70.45,30.25 71.95,30.25 73.45,30.25 66.7,31 68.2,31 69.7,31 71.2,31 72.7,31 74.2,31 67.45,31.75 68.95,31.75 70.45,31.75 71.95,31.75 73.45,31.75 66.7,32.5 68.2,32.5 69.7,32.5 71.2,32.5 72.7,32.5 74.2,32.5 66.7,34.5 68.2,34.5 69.7,34.5 71.2,34.5 72.7,34.5 74.2,34.5 67.45,35.25 68.95,35.25 70.45,35.25 71.95,35.25 73.45,35.25 66.7,36 68.2,36 69.7,36 71.2,36 72.7,36 74.2,36 67.45,36.75 68.95,36.75 70.45,36.75 71.95,36.75 73.45,36.75 66.7,37.5 68.2,37.5 69.7,37.5 71.2,37.5 72.7,37.5 74.2,37.5 67.45,38.25 68.95,38.25 70.45,38.25 71.95,38.25 73.45,38.25 66.7,39 68.2,39 69.7,39 71.2,39 72.7,39 74.2,39 67.45,39.75 68.95,39.75 70.45,39.75 71.95,39.75 73.45,39.75 66.7,40.5 68.2,40.5 69.7,40.5 71.2,40.5 72.7,40.5 74.2,40.5 67.45,41.25 68.95,41.25 70.45,41.25 71.95,41.25 73.45,41.25 66.7,42 68.2,42 69.7,42 71.2,42 72.7,42 74.2,42 67.45,42.75 68.95,42.75 70.45,42.75 71.95,42.75 73.45,42.75 66.7,43.5 68.2,43.5 69.7,43.5 71.2,43.5 72.7,43.5 74.2,43.5
VIN: C1.2 C2.2 C3.2 C4.2 C5.2 C6.2 C7.2 C8.2 C12.2 C13.2 C14.2 C15.2 D1.1 J3.1 Q1.2 Q2.2 Q3.2 Q4.2 Q5.2 Q6.2 TP4.1 | length 103.3
  Top Layer w0.254: Q2.2@32.29,24.79 v1(32.5,25) ; J3.1@33.65,19.161 J3.1 33.65,23.15 v1(34,23.5)
  Top Layer w2: 30.8,23.9 30.8,1.719 82.762,1.719 82.762,23.5 82.762,24.25 82.762,25 Q3.2@82.762,26.123
  other v1: 21.5,23.5 23,23.5 24.5,23.5 26,23.5 27.5,23.5 29,23.5 32.5,23.5 35.5,23.5 37,23.5 38.5,23.5 40,23.5 80.5,23.5 82,23.5 83.5,23.5 85,23.5 86.5,23.5 88,23.5 22.25,24.25 23.75,24.25 25.25,24.25 26.75,24.25 28.25,24.25 33.25,24.25 34.75,24.25 36.25,24.25 37.75,24.25 39.25,24.25 81.25,24.25 82.75,24.25 84.25,24.25 85.75,24.25 87.25,24.25 21.5,25 23,25 24.5,25 26,25 27.5,25 29,25 34,25 35.5,25 37,25 38.5,25 40,25 80.5,25 82,25 83.5,25 85,25 86.5,25 88,25 22.25,25.75 23.75,25.75 25.25,25.75 26.75,25.75 28.25,25.75 33.25,25.75 34.75,25.75 36.25,25.75 37.75,25.75 39.25,25.75 81.25,25.75 82.75,25.75 84.25,25.75 85.75,25.75 87.25,25.75 21.5,26.5 23,26.5 24.5,26.5 26,26.5 27.5,26.5 29,26.5 32.5,26.5 34,26.5 35.5,26.5 37,26.5 38.5,26.5 40,26.5 80.5,26.5 82,26.5 83.5,26.5 85,26.5 86.5,26.5 88,26.5 22.25,27.25 23.75,27.25 25.25,27.25 26.75,27.25 28.25,27.25 33.25,27.25 34.75,27.25 36.25,27.25 37.75,27.25 39.25,27.25 81.25,27.25 82.75,27.25 84.25,27.25 85.75,27.25 87.25,27.25 21.5,28 23,28 24.5,28 26,28 27.5,28 29,28 32.5,28 34,28 35.5,28 37,28 38.5,28 40,28 80.5,28 82,28 83.5,28 85,28 86.5,28 88,28 22.25,28.75 23.75,28.75 25.25,28.75 26.75,28.75 28.25,28.75 33.25,28.75 34.75,28.75 36.25,28.75 37.75,28.75 39.25,28.75 81.25,28.75 82.75,28.75 84.25,28.75 85.75,28.75 87.25,28.75 21.5,29.5 23,29.5 24.5,29.5 26,29.5 27.5,29.5 29,29.5 32.5,29.5 34,29.5 35.5,29.5 37,29.5 38.5,29.5 40,29.5 80.5,29.5 82,29.5 83.5,29.5 85,29.5 86.5,29.5 88,29.5 22.25,30.25 23.75,30.25 25.25,30.25 26.75,30.25 28.25,30.25 33.25,30.25 34.75,30.25 36.25,30.25 37.75,30.25 39.25,30.25 81.25,30.25 82.75,30.25 84.25,30.25 85.75,30.25 87.25,30.25 21.5,31 23,31 24.5,31 26,31 27.5,31 29,31 32.5,31 34,31 35.5,31 37,31 38.5,31 40,31 80.5,31 82,31 83.5,31 85,31 86.5,31 88,31 22.25,31.75 23.75,31.75 25.25,31.75 26.75,31.75 28.25,31.75 33.25,31.75 34.75,31.75 36.25,31.75 37.75,31.75 39.25,31.75 81.25,31.75 82.75,31.75 84.25,31.75 85.75,31.75 87.25,31.75 21.5,32.5 23,32.5 24.5,32.5 26,32.5 27.5,32.5 29,32.5 32.5,32.5 34,32.5 35.5,32.5 37,32.5 38.5,32.5 40,32.5 80.5,32.5 82,32.5 83.5,32.5 85,32.5 86.5,32.5 88,32.5 21.5,34.5 23,34.5 24.5,34.5 26,34.5 27.5,34.5 29,34.5 32.5,34.5 34,34.5 35.5,34.5 37,34.5 38.5,34.5 40,34.5 80.5,34.5 82,34.5 83.5,34.5 85,34.5 86.5,34.5 88,34.5 22.25,35.25 23.75,35.25 25.25,35.25 26.75,35.25 28.25,35.25 33.25,35.25 34.75,35.25 36.25,35.25 37.75,35.25 39.25,35.25 81.25,35.25 82.75,35.25 84.25,35.25 85.75,35.25 87.25,35.25 21.5,36 23,36 24.5,36 26,36 27.5,36 29,36 32.5,36 34,36 35.5,36 37,36 38.5,36 40,36 80.5,36 82,36 83.5,36 85,36 86.5,36 88,36 22.25,36.75 23.75,36.75 25.25,36.75 26.75,36.75 28.25,36.75 33.25,36.75 34.75,36.75 36.25,36.75 37.75,36.75 39.25,36.75 81.25,36.75 82.75,36.75 84.25,36.75 85.75,36.75 87.25,36.75 21.5,37.5 23,37.5 24.5,37.5 26,37.5 27.5,37.5 29,37.5 32.5,37.5 34,37.5 35.5,37.5 37,37.5 38.5,37.5 40,37.5 80.5,37.5 82,37.5 83.5,37.5 85,37.5 86.5,37.5 88,37.5 22.25,38.25 23.75,38.25 25.25,38.25 26.75,38.25 28.25,38.25 33.25,38.25 34.75,38.25 36.25,38.25 37.75,38.25 39.25,38.25 81.25,38.25 82.75,38.25 84.25,38.25 85.75,38.25 87.25,38.25 21.5,39 23,39 24.5,39 26,39 27.5,39 29,39 32.5,39 34,39 35.5,39 37,39 38.5,39 40,39 80.5,39 82,39 83.5,39 85,39 86.5,39 88,39 22.25,39.75 23.75,39.75 25.25,39.75 26.75,39.75 28.25,39.75 33.25,39.75 34.75,39.75 36.25,39.75 37.75,39.75 39.25,39.75 81.25,39.75 82.75,39.75 84.25,39.75 85.75,39.75 87.25,39.75 21.5,40.5 23,40.5 24.5,40.5 26,40.5 27.5,40.5 29,40.5 32.5,40.5 34,40.5 35.5,40.5 37,40.5 38.5,40.5 40,40.5 80.5,40.5 82,40.5 83.5,40.5 85,40.5 86.5,40.5 88,40.5 22.25,41.25 23.75,41.25 25.25,41.25 26.75,41.25 28.25,41.25 33.25,41.25 34.75,41.25 36.25,41.25 37.75,41.25 39.25,41.25 81.25,41.25 82.75,41.25 84.25,41.25 85.75,41.25 87.25,41.25 21.5,42 23,42 24.5,42 26,42 27.5,42 29,42 32.5,42 34,42 35.5,42 37,42 38.5,42 40,42 80.5,42 82,42 83.5,42 85,42 86.5,42 88,42 22.25,42.75 23.75,42.75 25.25,42.75 26.75,42.75 28.25,42.75 33.25,42.75 34.75,42.75 36.25,42.75 37.75,42.75 39.25,42.75 81.25,42.75 82.75,42.75 84.25,42.75 85.75,42.75 87.25,42.75 21.5,43.5 23,43.5 24.5,43.5 26,43.5 27.5,43.5 29,43.5 32.5,43.5 34,43.5 35.5,43.5 37,43.5 38.5,43.5 40,43.5 80.5,43.5 82,43.5 83.5,43.5 85,43.5 86.5,43.5 88,43.5 25,45.5 23.6,45.6 26.4,45.6 22.9,46.2 24.3,46.2 25.7,46.2 27.1,46.2 22.2,46.9 23.6,46.9 25,46.9 26.4,46.9 27.8,46.9 21.6,47.6 22.9,47.6 24.3,47.6 25.7,47.6 27.1,47.6 28.4,47.6 22.2,48.3 23.6,48.3 25,48.3 26.4,48.3 27.8,48.3 21.5,49 22.9,49 24.3,49 25.7,49 27.1,49 28.5,49 22.2,49.7 23.6,49.7 25,49.7 26.4,49.7 27.8,49.7 21.6,50.4 22.9,50.4 24.3,50.4 25.7,50.4 27.1,50.4 28.4,50.4 22.2,51.1 23.6,51.1 25,51.1 26.4,51.1 27.8,51.1 22.9,51.8 24.3,51.8 25.7,51.8 27.1,51.8 23.6,52.4 26.4,52.4 25,52.5
pads on no net: TP10.1 TP11.1

## Polygon pours and split planes (outlines as drawn)
SHB on Top Layer "SHB_L01_P055" (solid, pour order 55): 42.6,43.988 42.6,21.688 39.629,21.688 39.629,19.513 51.4,19.513 51.4,22.887 54.8,22.888 54.8,43.987
SHC on Top Layer "SHC_L01_P054" (solid, pour order 54): 77.8,43.888 77.8,21.588 80.771,21.588 80.771,19.413 69,19.413 69,22.787 65.6,22.788 65.6,43.887
SHA on Top Layer "SHA_L01_P010" (solid, pour order 10): 18.8,44 18.8,21.7 21.771,21.7 21.771,19.525 10,19.525 10,22.9 6.6,22.9 6.6,44
VIN on Top Layer "VIN_L01_P003" (solid, pour order 3): 20.672,23 20.672,44 40.928,44 40.928,23
PHA on Top Layer "PHA_L01_P015" (solid, pour order 15): 10.44,15.56 21.432,15.56 cw(c21.432,15.021) 21.971,15.021 21.971,3.84 cw(c21.209,3.84) 21.209,3.078 10.668,3.078 cw(c10.668,3.84) 9.906,3.84 9.906,15.026 cw(c10.44,15.026)
PHB on Top Layer "PHB_L01_P016" (solid, pour order 16): 40,15.56 50.961,15.56 cw(c50.961,14.944) 51.576,14.945 51.576,3.918 cw(c50.815,3.918) 50.814,3.156 40.273,3.156 cw(c40.273,3.918) 39.511,3.918 39.511,15.072 cw(c40,15.072)
PHC on Top Layer "PHC_L01_P017" (solid, pour order 17): 69.5,15.56 80.492,15.56 cw(c80.492,15.085) 80.968,15.085 80.968,3.918 cw(c80.206,3.918) 80.205,3.156 69.665,3.156 cw(c69.664,3.918) 68.903,3.918 68.903,14.962 cw(c69.5,14.962)
PHA on Bottom Layer "PHA_L04_P043" (solid, pour order 43): 9.75,3.594 ccw(c10.844,3.594) 10.844,2.5 21.5,2.5 ccw(c21.5,3.5) 22.5,3.5 22.5,14 ccw(c21.5,14) 21.5,15 10.94,15 10.748,15 ccw(c10.748,14.002) 9.75,14.002
PHC on Bottom Layer "PHC_L04_P045" (solid, pour order 45): 80,2.5 ccw(c80,3.515) 81.015,3.515 81.015,13.985 ccw(c80,13.985) 80,15 69.265,15 ccw(c69.265,14) 68.265,14 68.265,3.5 ccw(c69.265,3.5) 69.265,2.5
PHB on Bottom Layer "PHB_L04_P044" (solid, pour order 44): 52,3.5 52,14 ccw(c51,14) 51,15 40,15 ccw(c40,14) 39,14 39,3.5 ccw(c40,3.5) 40,2.5 51,2.5 ccw(c51,3.5)
PHA on Layer 1 "PHA_L02_P027" (solid, pour order 27): 22.5,3.5 22.5,14 ccw(c21.5,14) 21.5,15 9.734,15 9.734,2.5 21.5,2.5 ccw(c21.5,3.5)
PHB on Layer 1 "PHB_L02_P031" (solid, pour order 31): 52,3.5 52,14 ccw(c51,14) 51,15 40,15 ccw(c40,14) 39,14 39,3.5 ccw(c40,3.5) 40,2.5 51,2.5 ccw(c51,3.5)
PHC on Layer 1 "PHC_L02_P032" (solid, pour order 32): 81,2.5 81,15 69.161,15 ccw(c69.161,14) 68.161,14 68.161,3.5 ccw(c69.161,3.5) 69.161,2.5
PHC on Layer 2 "PHC_L03_P037" (solid, pour order 37): 81,2.5 81,15 69.262,15 ccw(c69.261,14) 68.262,14 68.262,3.5 ccw(c69.262,3.5) 69.262,2.5
PHB on Layer 2 "PHB_L03_P035" (solid, pour order 35): 52,3.5 52,14 ccw(c51,14) 51,15 40,15 ccw(c40,14) 39,14 39,3.5 ccw(c40,3.5) 40,2.5 51,2.5 ccw(c51,3.5)
PHA on Layer 2 "PHA_L03_P034" (solid, pour order 34): 22.5,3.5 22.5,14 ccw(c21.5,14) 21.5,15 9.749,15 9.749,2.5 21.5,2.5 ccw(c21.5,3.5)
no net on Top Solder "NONET_L-01_P-001" (solid): 20.55,44.1 40.85,44.1 40.85,22.9 20.55,22.9

## Keep-outs
Keep-Out Layer:
  the board outline again, w0.025

## Silkscreen, mask and mechanical layers (free items; w line width, h text height)
Top Overlay:
  text "GND" at 75.201,50.15 h1.5
  text "VBAT" at 14.851,49.75 h1.5
  text "REV A" at 2.005,17.441 h1
  text "PS 1/31" at 2.005,15.895 h1
  text "U" at 7.983,5.843 h5
  text "V" at 36.928,5.443 h5
  text "W" at 64.245,5.243 h5
Mechanical 6:
  lines w0.025: -0.635,1 0.635,1 ; 0,0.365 0,1.635
Drill Drawing:
  circle w0.254: c3.199,63.112 r0.701
  lines w0.254: 2.498,66.967 3.9,66.967 3.199,65.566 2.498,66.967
  lines w0.381: 1.227,61.465 93.878,61.465 ; 1.227,67.773 93.878,67.773 ; 9.334,58.311 9.334,70.928 ; 17.427,58.311 17.427,70.928 ; 32.099,58.311 32.099,70.928 ; 38.385,58.311 38.385,70.928 ; 47.536,58.311 47.536,70.928 ; 64.879,58.311 64.879,70.928 ; 72.377,58.311 72.377,70.928 ; 82.173,58.311 82.173,70.928 ; 1.227,58.311 93.878,58.311 93.878,70.928 1.227,70.928 1.227,58.311
  text "Symbol" at 3.12,68.72 h1.83
  text "Count" at 10.28,68.72 h1.83
  text "Hole Size" at 18.374,68.72 h1.83
  text "Plated" at 33.045,68.72 h1.83
  text "Hole Type" at 39.331,68.72 h1.83
  text "Drill Layer Pair" at 48.482,68.72 h1.83
  text "Via/Pad" at 65.825,68.72 h1.83
  text "Pad Shape" at 73.324,68.72 h1.83
  text "Template" at 83.12,68.72 h1.83
  text "4" at 10.28,65.566 h1.52
  text "3.200mm (125.98mil)" at 18.374,65.566 h1.52
  text "NPTH" at 33.045,65.566 h1.52
  text "Round" at 39.331,65.566 h1.52
  text "Top Layer - Bottom Layer" at 48.482,65.566 h1.52
  text "Pad" at 65.825,65.566 h1.52
  text "Rounded" at 73.324,65.566 h1.52
  text "c0hn320" at 83.12,65.566 h1.52
  text "1124" at 10.28,62.411 h1.52
  text "0.400mm (15.75mil)" at 18.374,62.411 h1.52
  text "PTH" at 33.045,62.411 h1.52
  text "Round" at 39.331,62.411 h1.52
  text "Top Layer - Bottom Layer" at 48.482,62.411 h1.52
  text "Via" at 65.825,62.411 h1.52
  text "Rounded" at 73.324,62.411 h1.52
  text "v60h40m0mx0" at 83.12,62.411 h1.52
  text "1128 Total" at 10.28,59.257 h1.52

## Dimensions
85.5,0 to 88,55 on Mechanical 1
0,5.5 to 91,5.5 on Mechanical 1

## Text inside footprints (layer, text, board x,y; h text height)
C9: Mechanical 8 "1" at 26.75,11.964 h0.64 r180; Mechanical 8 "2" at 25.35,11.964 h0.64 r180
C10: Mechanical 8 "2" at 35.254,9.8 h0.64 r180; Mechanical 8 "1" at 36.654,9.8 h0.64 r180
C11: Mechanical 8 "2" at 55.454,10.4 h0.64 r180; Mechanical 8 "1" at 56.854,10.4 h0.64 r180
Q1: Mechanical 8 "2" at 25.15,38.238 h0.64 r90; Mechanical 8 "3" at 17.05,38.608 h0.64; Mechanical 8 "1" at 17.15,43.408 h0.64
Q2: Mechanical 8 "2" at 36.35,28.762 h0.64 r270; Mechanical 8 "3" at 44.45,28.392 h0.64 r180; Mechanical 8 "1" at 44.35,23.592 h0.64 r180
Q3: Mechanical 8 "1" at 76.15,32.408 h0.64; Mechanical 8 "3" at 76.05,27.608 h0.64; Mechanical 8 "2" at 84.15,27.238 h0.64 r90
Q4: Mechanical 8 "2" at 25.15,27.238 h0.64 r90; Mechanical 8 "3" at 17.05,27.608 h0.64; Mechanical 8 "1" at 17.15,32.408 h0.64
Q5: Mechanical 8 "1" at 44.35,34.592 h0.64 r180; Mechanical 8 "3" at 44.45,39.392 h0.64 r180; Mechanical 8 "2" at 36.35,39.762 h0.64 r270
Q6: Mechanical 8 "2" at 84.15,38.238 h0.64 r90; Mechanical 8 "3" at 76.05,38.608 h0.64; Mechanical 8 "1" at 76.15,43.408 h0.64
Q7: Mechanical 8 "2" at 11.35,38.238 h0.64 r90; Mechanical 8 "3" at 3.25,38.608 h0.64; Mechanical 8 "1" at 3.35,43.408 h0.64
Q8: Mechanical 8 "1" at 58.15,23.592 h0.64 r180; Mechanical 8 "3" at 58.25,28.392 h0.64 r180; Mechanical 8 "2" at 50.15,28.762 h0.64 r270
Q9: Mechanical 8 "1" at 62.35,32.408 h0.64; Mechanical 8 "3" at 62.25,27.608 h0.64; Mechanical 8 "2" at 70.35,27.238 h0.64 r90
Q10: Mechanical 8 "1" at 3.35,32.408 h0.64; Mechanical 8 "3" at 3.25,27.608 h0.64; Mechanical 8 "2" at 11.35,27.238 h0.64 r90
Q11: Mechanical 8 "2" at 50.15,39.762 h0.64 r270; Mechanical 8 "3" at 58.25,39.392 h0.64 r180; Mechanical 8 "1" at 58.15,34.592 h0.64 r180
Q12: Mechanical 8 "1" at 62.35,43.408 h0.64; Mechanical 8 "3" at 62.25,38.608 h0.64; Mechanical 8 "2" at 70.35,38.238 h0.64 r90
R1: Mechanical 8 "1" at 24.408,21.2 h0.64; Mechanical 8 "2" at 26.008,21.2 h0.64
R3: Mechanical 8 "2" at 35.892,21.4 h0.64 r180; Mechanical 8 "1" at 37.492,21.4 h0.64 r180
R5: Mechanical 8 "2" at 65.642,22 h0.64 r180; Mechanical 8 "1" at 67.242,22 h0.64 r180
R13: Mechanical 8 "2" at 5.608,21.4 h0.64; Mechanical 8 "1" at 4.008,21.4 h0.64
R14: Mechanical 8 "2" at 57.108,21.2 h0.64; Mechanical 8 "1" at 55.508,21.2 h0.64
R15: Mechanical 8 "2" at 63.208,21 h0.64; Mechanical 8 "1" at 61.608,21 h0.64
R16: Mechanical 8 "1" at 25.684,10.249 h0.64; Mechanical 8 "2" at 27.284,10.249 h0.64
R17: Mechanical 8 "2" at 37.291,12.588 h0.64; Mechanical 8 "1" at 35.691,12.588 h0.64
R18: Mechanical 8 "2" at 57.391,12.988 h0.64; Mechanical 8 "1" at 55.791,12.988 h0.64
RT1: Mechanical 8 "1" at 25.684,13.194 h0.64; Mechanical 8 "2" at 27.284,13.194 h0.64
RT2: Mechanical 8 "2" at 37.308,11.1 h0.64; Mechanical 8 "1" at 35.708,11.1 h0.64
RT3: Mechanical 8 "2" at 57.408,11.6 h0.64; Mechanical 8 "1" at 55.808,11.6 h0.64
TP1: Mechanical 8 "1" at 14.222,8 h0.64
TP2: Mechanical 8 "1" at 43.722,8 h0.64
TP3: Mechanical 8 "1" at 73.222,8 h0.64
TP4: Mechanical 8 "1" at 23.222,49 h0.64
TP9: Mechanical 8 "1" at 64.222,49 h0.64